# EAGLE board ProjV1 (EAGLE 9.6.2)
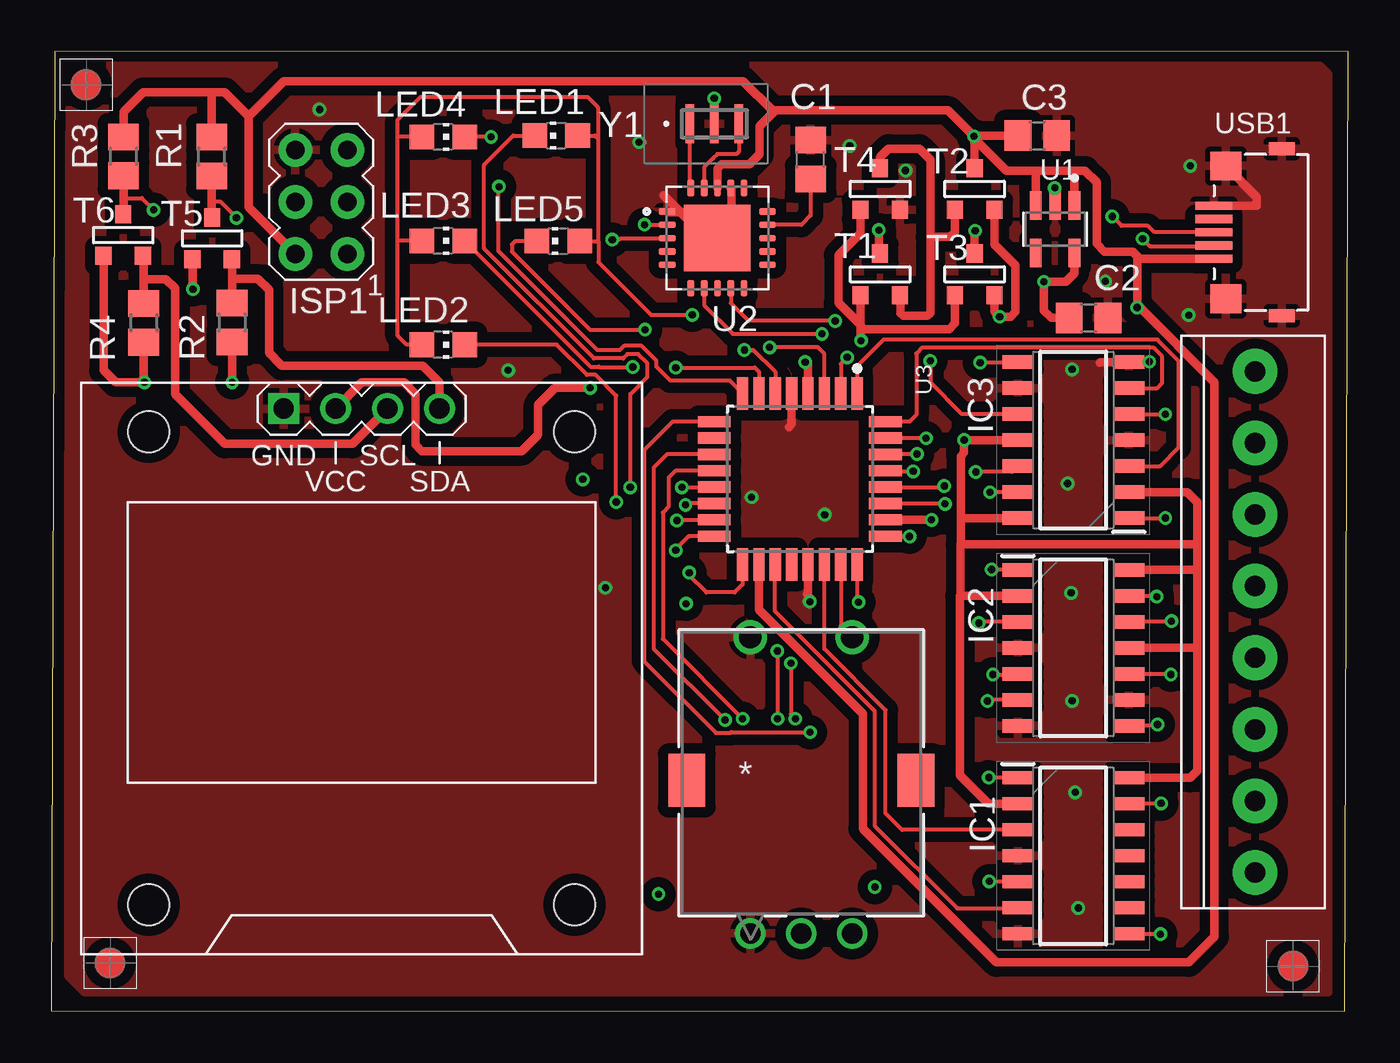
[diagram p0: board, top side]
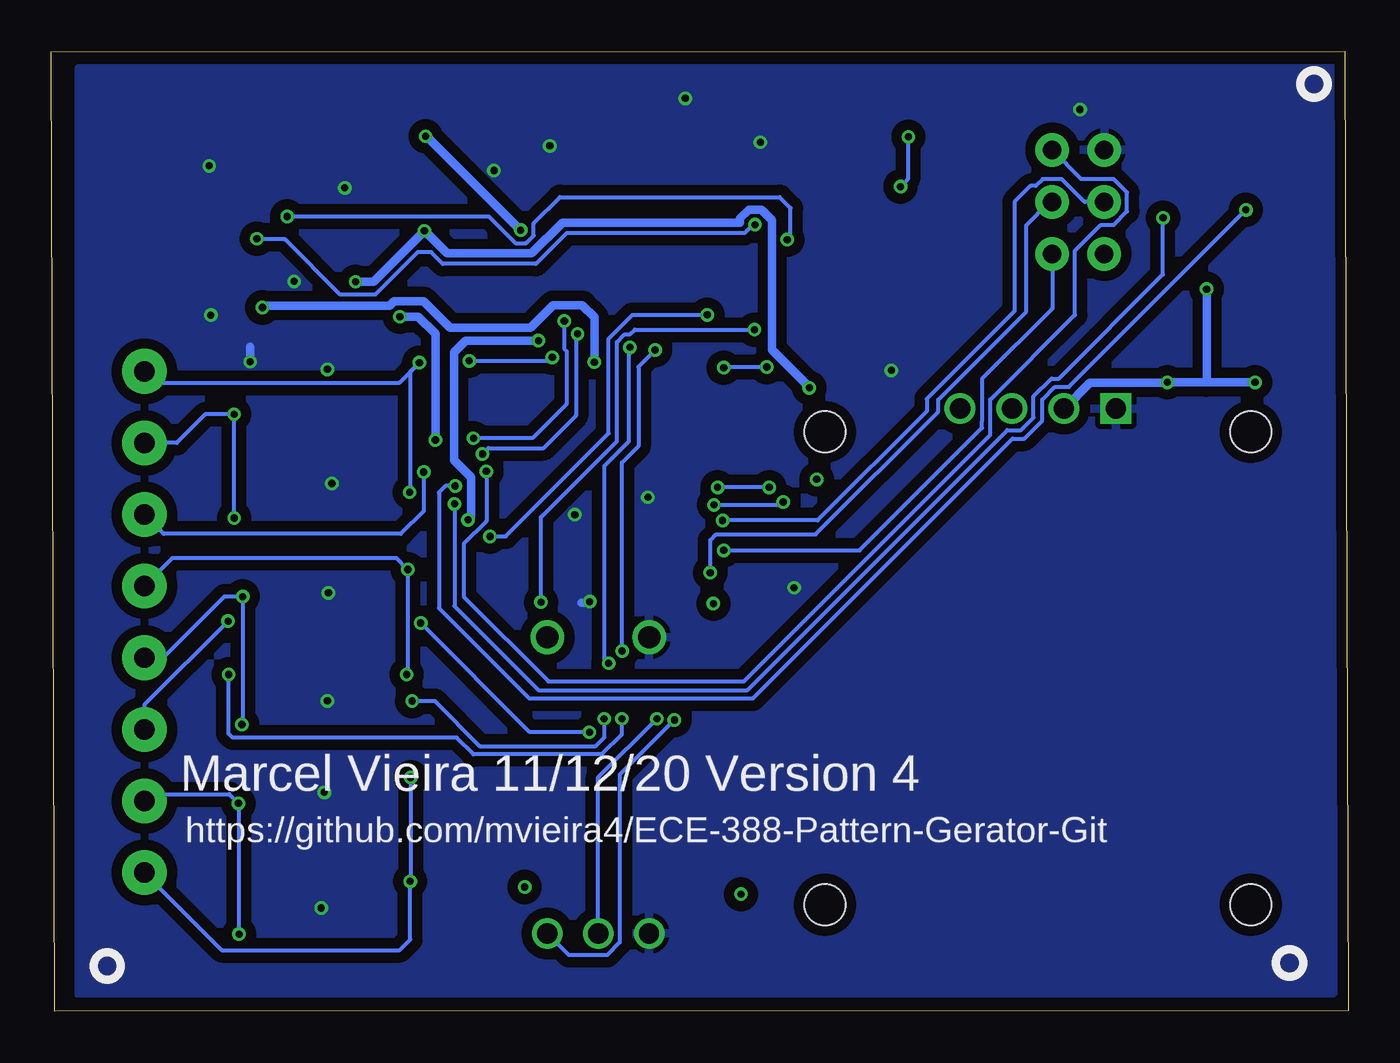
[diagram p1: board, bottom side, seen from below]

Size 63.43 x 46.94 mm. Coordinates in mm from the lower left corner, seen from the top.
Outline: 0,0.03 63.25,0 63.43,46.91 0.18,46.94 0,0.03
Copper layers (1*16): Top 0.035mm / dielectric 1.5mm / Bottom 0.035mm
Design rules "Dirty8TS": minimum track width 5mil, minimum drill 12mil, track to track 8mil, track to pad 8mil, pad to pad 8mil, via to via 8mil, smd to smd 0mil, copper to edge 10mil, drill to drill 10mil, minimum pad ring 10mil, minimum via ring 6mil, stop-mask expansion 2mil, vias tented up to drill 25mil, thermal gap 10mil

## Footprints (pad centres in the part's own frame; a part is rotated, then mirrored left to right if it is on the bottom)
C0805 = smd 1.3 x 1.5: 1 -0.95,0; 2 0.95,0
SOIC127P600X175-14N = smd 1.525 x 0.65: 1 -2.712,3.81; 2 -2.712,2.54; 3 -2.712,1.27; 4 -2.712,0; 5 -2.712,-1.27; 6 -2.712,-2.54; 7 -2.712,-3.81; 8 2.712,-3.81; 9 2.712,-2.54; 10 2.712,-1.27; 11 2.712,0; 12 2.712,1.27; 13 2.712,2.54; 14 2.712,3.81
AVRISP = drill 0.9 pad 1.626: 1 -1.27,2.54; 2 1.27,2.54; 3 -1.27,0; 4 1.27,0; 5 -1.27,-2.54; 6 1.27,-2.54
1X08-3.5MM = drill 1 pad 2.184: 1 -12.25,0; 2 -8.75,0; 3 -5.25,0; 4 -1.75,0; 5 1.75,0; 6 5.25,0; 7 8.75,0; 8 12.25,0
CHIP-LED0805 = smd 1.2 x 1.2: A 0,-1.05; C 0,1.05
R0805 = smd 1.3 x 1.5: 1 -0.95,0; 2 0.95,0
SOT-23 = smd 0.787 x 0.889: 1 0.025,-1.016; 2 -0.94,1.016; 3 0.991,1.016
SOT95P280X145-5N = smd 1.39 x 0.58: 1 -1.165,0.95; 2 -1.165,0; 3 -1.165,-0.95; 4 1.165,-0.95; 5 1.165,0.95
QFN65P500X500X100-21N = smd 0.81 x 0.32: 1 -2.45,1.3; 2 -2.45,0.65; 3 -2.45,0; 4 -2.45,-0.65; 5 -2.45,-1.3; 11 2.45,-1.3; 12 2.45,-0.65; 13 2.45,0; 14 2.45,0.65; 15 2.45,1.3 | smd 0.32 x 0.81: 6 -1.3,-2.45; 7 -0.65,-2.45; 8 0,-2.45; 9 0.65,-2.45; 10 1.3,-2.45; 16 1.3,2.45; 17 0.65,2.45; 18 0,2.45; 19 -0.65,2.45; 20 -1.3,2.45 | smd 3.25 x 3.25: 21 0,0
QFP80P900X900X120-32N = smd 1.6 x 0.55: 1 -4.18,2.8; 2 -4.18,2; 3 -4.18,1.2; 4 -4.18,0.4; 5 -4.18,-0.4; 6 -4.18,-1.2; 7 -4.18,-2; 8 -4.18,-2.8; 17 4.18,-2.8; 18 4.18,-2; 19 4.18,-1.2; 20 4.18,-0.4; 21 4.18,0.4; 22 4.18,1.2; 23 4.18,2; 24 4.18,2.8 | smd 0.55 x 1.6: 9 -2.8,-4.18; 10 -2,-4.18; 11 -1.2,-4.18; 12 -0.4,-4.18; 13 0.4,-4.18; 14 1.2,-4.18; 15 2,-4.18; 16 2.8,-4.18; 25 2.8,4.18; 26 2,4.18; 27 1.2,4.18; 28 0.4,4.18; 29 -0.4,4.18; 30 -1.2,4.18; 31 -2,4.18; 32 -2.8,4.18
EN11-HSM_TTE = drill 0.991 pad 1.499: 1 -2.489,7.874; 2 2.489,7.874; 3 0,7.874 | drill 1.092 pad 1.6: 4 -2.489,22.352; 5 2.489,22.352 | smd 1.803 x 2.591: 6 -5.601,15.354; 7 5.601,15.354
DISPLAY-OLED-128X64-I2C = drill 1 square: 1 -3.81,12.7 | drill 1: 2 -1.27,12.7; 3 1.27,12.7; 4 3.81,12.7 | hole 2: -10.414,11.557; 10.414,11.557; 10.414,-11.557; -10.414,-11.557
C77238 = smd 1.5 x 1.4: 0 0.825,0.814; 0A 0.825,7.314 | smd 1.27 x 0.635: 0B 3.566,8.139; 0C 3.566,-0.011 | smd 1.8 x 0.4: 1 0.244,2.768; 2 0.244,3.418; 3 0.244,4.068; 4 0.244,4.718; 5 0.244,5.369
CSTNE12M0G55A000R0 = smd 0.4 x 1.9: 1 1.2,0; 2 0,0; 3 -1.2,0

## Placement (x,y rotation side)
C1  1u  [C0805]  37.14,41.64 90 top
C2  1u  [C0805]  50.72,33.9 0 top
C3  1u  [C0805]  48.22,42.81 0 top
IC1  CD4007UBM  [SOIC127P600X175-14N]  49.98,7.61 0 top
IC2  CD4007UBM  [SOIC127P600X175-14N]  49.98,17.77 0 top
IC3  CD4007UBM  [SOIC127P600X175-14N]  49.98,27.93 180 top
ISP1  AVRISP-6  [AVRISP]  13.21,39.57 180 top
JP1  [1X08-3.5MM]  58.87,19.04 270 top
LED1  [CHIP-LED0805]  24.69,42.81 90 top
LED2  [CHIP-LED0805]  19.17,32.59 270 top
LED3  [CHIP-LED0805]  19.17,37.67 270 top
LED4  [CHIP-LED0805]  19.17,42.75 270 top
LED5  [CHIP-LED0805]  24.79,37.66 90 top
R1  10k  [R0805]  7.86,41.79 90 top
R2  10k  [R0805]  8.85,33.67 270 top
R3  10k  [R0805]  3.54,41.8 90 top
R4  10k  [R0805]  4.53,33.66 270 top
T1  [SOT-23]  40.56,36.03 180 top
T2  [SOT-23]  45.18,40.2 180 top
T3  [SOT-23]  45.18,36.03 180 top
T4  [SOT-23]  40.56,40.2 180 top
T5  [SOT-23]  7.9,37.79 180 top
T6  [SOT-23]  3.55,37.95 180 top
U1  MIC5504-3.3YM5-T5  [SOT95P280X145-5N]  49.09,38.24 270 top
U2  MCP2200-I/MQ  [QFN65P500X500X100-21N]  32.58,37.8 0 top
U3  ATMEGA328PB-AU  [QFP80P900X900X120-32N]  36.61,26.03 270 top
U4  EN11-HSM1BF20  [EN11-HSM_TTE]  36.68,-4.06 0 top
U$1  DISPLAY-OLED-128X64-I2C  [DISPLAY-OLED-128X64-I2C]  15.18,16.77 0 top
U$2  [FIDUCIAL_G15S]  2.88,2.37 0 top
U$3  [FIDUCIAL_G15S]  1.71,45.3 0 top
U$4  [FIDUCIAL_G15S]  60.72,2.22 0 top
USB1  C77238  [C77238]  56.61,34.02 0 top
Y1  CSTNE12M0G55A000R0  [CSTNE12M0G55A000R0]  32.43,43.39 180 top

## Library data of the parts
C1-C3 = rcl; SPICEPREFIX: C
IC1-IC3 = CD4007UBM; ARROW_PART_NUMBER: CD4007UBM; ARROW_PRICE-STOCK: https://www.arrow.com/en/products/cd4007ubm/texas-instruments; DESCRIPTION: Texas Instruments CD4007UBM Inverter, 3 18 V, 14-Pin SOIC; HEIGHT: 1.75mm; MANUFACTURER_NAME: Texas Instruments; MANUFACTURER_PART_NUMBER: CD4007UBM; MOUSER_PART_NUMBER: 595-CD4007UBM; MOUSER_PRICE-STOCK: https://www.mouser.co.uk/ProductDetail/Texas-Instruments/CD4007UBM?qs=LfG3tU9ud8BhOMkMTdqqtw%3D%3D
ISP1 JP1 = adafruit
LED1-LED5 = led
R1-R4 = rcl; SPICEPREFIX: R
T1-T6 = zetex; OC_FARNELL: unknown; OC_NEWARK: unknown
U1 = MIC5504-3.3YM5-T5; AVAILABILITY: Good; DESCRIPTION: Linear Voltage Regulator IC 1 Output 300mA SOT-23-5; MF: Microchip; MP: MIC5504-3.3YM5-T5; PACKAGE: SOT-23-5 Microchip; PRICE: None; PURCHASE-URL: https://pricing.snapeda.com/search/part/MIC5504-3.3YM5-T5/?ref=eda
U2 = MCP2200-I_MQ; AVAILABILITY: Good; DESCRIPTION: USB Bridge, USB to UART USB 2.0 UART Interface 20-VQFN (5x5); MF: Microchip; MP: MCP2200-I/MQ; PACKAGE: VQFN-20 Microchip; PRICE: None; PURCHASE-URL: https://pricing.snapeda.com/search/part/MCP2200-I/MQ/?ref=eda
U3 = ATMEGA328PB-AU; AVAILABILITY: Good; DESCRIPTION: 8-bit Microcontrollers - MCU ATMEGA328PB 20MHZ IND TEMP; MF: Microchip Technology / Atmel; MP: ATMEGA328PB-AU; PACKAGE: None; PRICE: None; PURCHASE-URL: https://pricing.snapeda.com/search/part/ATMEGA328PB-AU/?ref=eda
U4 = EN11-HSM1BF20; MANUFACTURER_PART_NUMBER: EN11-HSM1BF20; SOURCELIBRARY: TTELECTRONICS_2018-05-01A; VENDOR: TT Electronics
U$1 = diy-modules
U$2-U$4 = dicons
USB1 = usbFromLCSC
Y1 = CSTNE12M0G55A000R0; ARROW_PART_NUMBER: CSTNE12M0G55A000R0; ARROW_PRICE-STOCK: https://www.arrow.com/en/products/cstne12m0g55a000r0/murata-manufacturing; DESCRIPTION: Resonators 12.0000MHz 33pF SMD CHP Resntr AUTO GRD; HEIGHT: 0.8mm; MANUFACTURER_NAME: Murata Electronics; MANUFACTURER_PART_NUMBER: CSTNE12M0G55A000R0; MOUSER_PART_NUMBER: 81-CSTNE12M0G55A000R; MOUSER_PRICE-STOCK: https://www.mouser.com/Search/Refine.aspx?Keyword=81-CSTNE12M0G55A000R

## Nets
0: C1.2 C2.2 C3.2 IC1.4 IC1.7 IC2.4 IC2.7 IC2.9 IC3.4 IC3.7 IC3.9 ISP1.6 T4.2 U1.2 U2.1 U2.17 U2.21 U3.5 U3.21 U4.1 U4.4 U$1.1 USB1.0 USB1.0A USB1.0B USB1.0C USB1.5 Y1.2
+3V3: C2.1 R2.2 R4.2 T3.1 T5.3 T6.3 U1.5 U$1.2
+5V: C3.1 ISP1.2 R1.2 R3.2 T1.1 T2.1 U1.1 U1.3 U2.18 U3.4 U3.18 USB1.1
C1: IC3.8 IC3.13 JP1.1
C2: IC3.1 IC3.5 JP1.2
C3: IC3.12 JP1.3
C4: IC2.1 IC2.5 JP1.4
C5: IC2.8 IC2.13 JP1.5
C6: IC2.12 JP1.6
C7: IC1.8 IC1.13 JP1.7
C8: IC1.1 IC1.5 JP1.8
CLK: U3.12 U4.3
D+: U2.3 USB1.3
D-: U2.2 USB1.2
DT: U3.23 U4.5
LC: IC1.2 IC1.14 IC2.2 IC2.11 IC2.14 IC3.2 IC3.11 IC3.14 T2.2 T3.2
LC1: IC3.6 U3.32
LC2: IC3.3 U3.1
LC3: IC3.10 U3.2
LC4: IC2.3 U3.9
LC5: IC2.6 U3.3
LC6: IC2.10 U3.6
LC7: IC1.6 U3.19
LC8: IC1.3 U3.22
LED1: LED1.C U3.13
LED2: LED2.C U3.14
LED3: LED3.C U3.7
LED4: LED4.C U3.8
LED5: LED5.C U3.24
LEDA: LED1.A LED2.A LED3.A LED4.A LED5.A U3.25
MISO: ISP1.1 U3.16
MOSI: ISP1.4 U3.15
N$1: IC1.9
N$2: IC1.10
N$3: IC1.11
N$4: U3.10
N$5: IC1.12
N$6: U2.19 Y1.3
N$7: C1.1 U2.14
N$9: T1.2 T2.3 T4.1
N$10: U2.7 U3.30
N$11: U2.9 U3.31
N$14: U2.20 Y1.1
N$16: R2.1 T5.2 U$1.4
N$19: R4.1 T6.2 U$1.3
N$30: U3.20
RST: ISP1.5 U3.29
SCK: ISP1.3 U3.17
SCL: R3.1 T6.1 U3.28
SDA: R1.1 T5.1 U3.27
SW: U3.11 U4.2
VSET: T1.3 T3.3 T4.3 U3.26

## Tracks (layer width: path | path; a pad name or v marks a point on that pad's centre or on a via)
0  (via drill 0.35)
  Top 0.406: v53.7,31.76 53.68,31.74 IC3.7 51.3,31.74 51.27,31.71 | U3.21 37.01,20.45 36.95,20.38 37.1,20.23 v37.1,20.04 | U1.2 49.08,39.42 v49.08,40.26 | Y1.2 v32.43,44.63 | USB1.0A 58.96,39.81 58.96,39.39 USB1.5 | U2.1 30.16,39.08 31.23,39.08 32.51,37.8 U2.21 | U2.21 32.66,37.8 33.26,38.39 33.26,40.23 U2.17 | U3.5 36.21,28.7 36.08,28.56 | U2.21 32.04,37.8 29.95,39.88
  Bottom 0.406: v53.7,31.76 53.7,32.48 | 37.5,19.98 37.15,19.98 v37.1,20.04
  other vias: 13.12,44.09 22.35,31.34 51.55,35.69 39.05,42.31 55.7,41.34 41.77,41.11 49.93,31.38 49.7,25.81 49.88,20.46 49.93,15.18 50.23,5.06 50.08,10.71 27.1,20.71 34.25,25.13 37.83,24.29 55.62,34.03 28.75,42.48
  pour Top (isolate 0.508): 0.84,46.23 0.84,1.75 1.65,0.93 62.45,0.93 62.45,45.81 62.04,46.23
  pour Bottom (isolate 0.508): 0.74,46.11 0.74,0.9 61.98,0.9 62.07,0.81 62.07,46.11
+3V3  (via drill 0.35)
  Top 0.406: T5.3 6.91,35.33 v6.93,35.31 | R2.2 v8.85,30.75 | R4.2 4.53,30.78 | 4.53,30.78 v4.56,30.75 | T6.3 2.56,31.34 3.15,30.75 4.5,30.75 4.53,30.78 | U1.5 50.04,36.09 49.62,35.67 v48.54,35.67 48.54,34.26 48.9,33.9 C2.1 | T3.1 45.16,38.13 v45.18,38.16 | U$1.2 15.19,30.75 17.25,30.75 17.82,30.18 17.82,27.69 18.12,27.39 23.01,27.39 23.82,28.2 23.82,29.65 24.65,30.48 v26.36,30.48
  Bottom 0.406: U$1.2 13.89,29.47 12.63,30.73 8.87,30.73 v8.85,30.75 6.96,30.75 | v4.56,30.75 6.96,30.75 | v48.54,35.67 47.67,35.67 v45.18,38.16 44.07,37.05 39.93,37.05 38.43,38.55 29.75,38.55 29.75,38.76 29.32,39.19 28.71,39.19 28.19,38.67 28.19,32.34 26.36,30.51 v26.36,30.48 | v6.93,35.31 6.93,30.78 6.96,30.75
+5V  (via drill 0.35)
  Top 0.406: R3.2 3.54,43.98 4.5,44.94 7.89,44.94 | ISP1.2 9.66,39.31 9.66,43.77 | 9.66,43.77 8.49,44.94 7.89,44.94 | R1.2 7.86,44.91 7.89,44.94 | T1.1 40.47,37.11 v40.47,38.19 | v45.12,42.78 45.16,42.74 T2.1 | C3.1 45.15,42.81 | 45.15,42.81 v45.12,42.78 | 48.06,41.1 46.71,41.1 45.15,42.66 45.15,42.81 | U1.3 48.14,41.02 48.06,41.1 | 50.01,41.1 50.55,41.1 51.12,40.53 51.12,37.53 51.51,37.14 52.89,37.14 53.1,36.93 53.1,36.69 | 50.01,41.1 48.06,41.1 | 50.01,41.1 50.04,41.07 U1.1 | U2.18 32.58,41.19 32.79,41.4 34.14,41.4 34.63,41.89 34.63,43.26 35.41,44.04 | v45.12,42.78 43.86,44.04 35.41,44.04 | U3.4 37.01,31.6 v36.87,31.74 | 35.41,44.04 35.28,44.04 33.84,45.48 11.37,45.48 9.66,43.77 | U3.18 34.61,19.63 37.35,16.89 39.69,14.55 39.69,8.94 46.23,2.4 55.62,2.4 56.88,3.66 56.88,30.77 53.24,34.41 v53.1,34.41 53.1,36.69 | USB1.1 53.2,36.79 53.1,36.69
  Bottom 0.406: v40.47,38.19 45.06,42.78 v45.12,42.78 | v36.87,31.74 36.87,33.93 37.47,34.53 38.88,34.53 39.99,33.42 43.92,33.42 45.22,34.72 46.65,34.72 46.88,34.5 53.01,34.5 v53.1,34.41
C1  (via drill 0.35)
  Top 0.203: IC3.8 47.24,31.71 v45.43,31.71 | IC3.13 47.26,25.38 v45.9,25.38
  Bottom 0.203: v45.9,25.38 45.87,25.41 45.87,31.27 v45.43,31.71 46.4,30.74 58.32,30.74 JP1.1
C2  (via drill 0.35)
  Top 0.203: IC3.5 v54.47,29.2 v54.48,29.19 | IC3.1 v54.48,24.12
  Bottom 0.203: JP1.2 57.29,27.79 55.89,29.19 v54.48,29.19 v54.48,24.12
C3  (via drill 0.35)
  Top 0.203: IC3.12 46.98,26.37 v45.21,26.37
  Bottom 0.203: v45.21,26.37 45.21,24.46 46.33,23.34 57.92,23.34 JP1.3
C4  (via drill 0.35)
  Top 0.203: IC2.1 46.01,21.58 v45.99,21.6 | v46.05,16.47 47.24,16.47 IC2.5
  Bottom 0.203: v46.05,16.47 45.99,16.53 45.99,18.73 45.99,19.25 v45.99,21.6 46.56,22.17 57.49,22.17 JP1.4
C5  (via drill 0.35)
  Top 0.203: IC2.13 54.03,20.31 v54.06,20.28 | v54.1,14.02 54.04,13.96 IC2.8
  Bottom 0.203: v54.1,14.02 54.06,14.06 v54.06,20.28 54.96,20.28 57.95,17.29 JP1.5
C6  (via drill 0.35)
  Top 0.203: IC2.12 52.73,19.08 v54.78,19.08
  Bottom 0.203: v54.78,19.08 58.87,14.99 JP1.6
C7  (via drill 0.35)
  Top 0.203: IC1.13 54.25,10.15 v54.27,10.17 | v54.24,3.78 52.71,3.78 IC1.8
  Bottom 0.203: v54.24,3.78 54.27,3.81 v54.27,10.17 54.72,10.62 58.54,10.62 JP1.7
C8  (via drill 0.35)
  Top 0.203: IC1.1 45.86,11.42 v45.84,11.43 | v45.87,6.36 47.25,6.36 IC1.5
  Bottom 0.203: v45.84,11.43 45.84,6.39 v45.87,6.36 45.87,3.51 46.38,3 55.08,3 JP1.8
CLK  (via drill 0.35)
  Top 0.203: U3.12 30.54,26.43 30.2,26.09 30.2,24.67 29.91,24.38 29.91,18.21 v33.81,14.31
  Bottom 0.203: U4.3 36.68,11.44 v33.81,14.31
D+  (via drill 0.35)
  Top 0.203: U2.3 30.1,37.77 27.81,37.77 27.77,37.73 v27.44,37.73 | USB1.3 53.95,38.09 53.63,38.4 52.34,38.4 v51.88,38.86
  Bottom 0.203: v27.44,37.73 27.27,37.9 27.27,39.27 27.81,39.81 38.55,39.81 39.84,38.52 39.84,37.93 40.21,37.56 40.73,37.56 42.03,38.86 v51.88,38.86
D-  (via drill 0.35)
  Top 0.203: U2.2 29.02,38.45 v29.01,38.46 | v53.37,37.77 53.73,37.41 56.83,37.41 USB1.2
  Bottom 0.203: v53.37,37.77 53.34,37.74 51.99,37.74 49.29,35.04 47.58,35.04 45.51,37.11 44.85,37.11 44.28,36.54 39.72,36.54 38.22,38.04 29.54,38.04 29.12,38.46 v29.01,38.46
DT
  Top 0.203: U3.23 38.61,18.85 U4.5
LC  (via drill 0.35)
  Top 0.406: T2.2 46.12,37.5 47.16,36.46 47.16,34.2 46.92,33.96 v46.38,33.96 46.12,34.22 T3.2 | IC3.11 v44.64,27.93 44.64,27.3 44.48,27.14 44.48,24.11 | 44.43,20.31 44.43,11.55 45.83,10.15 IC1.2 | IC2.2 44.43,20.31 | 47.17,24.02 IC3.14 44.49,24.12 44.48,24.11 | IC3.2 55.55,25.39 56.04,24.9 56.04,22.83 | 56.04,22.83 56.04,21.6 | 56.04,21.6 56.04,17.79 | 56.04,17.79 56.04,11.76 55.7,11.42 IC1.14 | IC2.11 56.02,17.77 56.04,17.79 | IC2.14 56.02,21.58 56.04,21.6 | 44.48,22.83 44.46,22.83 44.46,20.34 44.43,20.31 | 44.48,22.83 56.04,22.83 | 44.48,22.83 44.48,24.11
  Bottom 0.406: v44.64,27.93 44.64,33.12 45.48,33.96 v46.38,33.96
LC1
  Top 0.203: IC3.6 54.08,30.47 54.33,30.72 54.33,32.02 53.92,32.43 42.58,32.43 42.3,32.15 42.3,29.16 41.97,28.83 U3.32
LC2
  Top 0.203: IC3.3 54.23,26.66 55.14,27.57 55.14,31.79 54.09,32.84 40.7,32.84 39.41,31.55 U3.1
LC3  (via drill 0.35)
  Top 0.203: IC3.10 44.54,29.2 42.99,30.75 v42.99,31.8 | v38.93,31.97 38.61,31.65 U3.2
  Bottom 0.203: v42.99,31.8 39.1,31.8 v38.93,31.97
LC4  (via drill 0.35)
  Top 0.203: IC2.3 45.41,19.04 v45.36,18.99 | U3.9 30.39,28.83 28.99,27.43 28.99,17.13 32.5,13.62 33.21,13.62 33.25,13.65 v37.11,13.65
  Bottom 0.203: v45.36,18.99 40.05,13.68 37.14,13.68 v37.11,13.65
LC5  (via drill 0.35)
  Top 0.203: IC2.6 45.83,15.23 v45.78,15.18 | U3.3 37.81,32.14 37.49,32.46 v35.13,32.46 | v36.39,14.31 36.17,14.53 v36.17,17.02
  Bottom 0.203: v45.78,15.18 44.68,15.18 42.47,12.97 36.8,12.97 36.39,13.39 v36.39,14.31 | v36.17,17.02 36.39,17.24 36.39,26.65 35.19,27.85 35.19,32.4 v35.13,32.46
LC6  (via drill 0.35)
  Top 0.203: IC2.10 54.72,16.5 v54.75,16.47 | v33.9,32.33 34.34,32.33 35.41,31.26 U3.6 | v35.51,17.62 v35.51,14.32 v35.52,14.31
  Bottom 0.203: v35.51,17.62 v35.52,17.63 35.52,26.82 34.72,27.62 34.72,31.5 v33.9,32.33 | v35.52,14.31 35.52,13.56 36.52,12.56 42.78,12.56 43.6,13.38 54.55,13.38 54.75,13.58 v54.75,16.47
LC7
  Top 0.203: IC1.6 47.24,5.04 44.31,5.04 40.26,9.09 40.26,14.7 35.37,19.59 35.37,21.81 U3.19
LC8
  Top 0.203: IC1.3 41.61,8.88 40.8,9.69 40.8,14.73 37.81,17.72 U3.22
LED1  (via drill 0.35)
  Top 0.203: LED1.C 22.59,42.81 21.18,41.4 21.18,37.29 26.54,31.93 27.97,31.93 28.18,32.13 28.7,32.13 29.16,31.67 29.16,31.02 28.32,30.18 v28.32,25.62 | v30.84,25.62 U3.13
  Bottom 0.203: v28.32,25.62 v30.84,25.62
LED2  (via drill 0.35)
  Top 0.203: U3.14 31.09,24.83 v31.02,24.76 | v27.63,24.9 27.63,30.1 26.62,31.11 26.2,31.11 24.73,32.59 LED2.C
  Bottom 0.203: v31.02,24.76 27.63,24.76 v27.63,24.9
LED3  (via drill 0.35)
  Top 0.203: LED3.C 26.37,31.52 26.79,31.52 26.81,31.5 v28.44,31.5 | v30.54,31.47 34.41,31.47 34.61,31.27 U3.7
  Bottom 0.203: v28.44,31.5 30.51,31.5 v30.54,31.47
LED4  (via drill 0.35)
  Top 0.203: U3.8 33.18,30.84 30.28,30.84 29.6,31.52 29.6,31.81 28.87,32.54 28.01,32.54 27.8,32.33 26.71,32.33 21.87,37.17 21.87,40.29 v21.9,40.32 | v21.51,42.75 LED4.C
  Bottom 0.203: v21.9,40.32 21.54,40.68 21.54,42.72 v21.51,42.75
LED5  (via drill 0.35)
  Top 0.203: U3.24 39.41,20.08 v39.48,20.01 | v29.04,33.33 26.34,33.33 22.53,37.14 22.53,37.5 22.69,37.66 LED5.C
  Bottom 0.203: v39.48,20.01 39.48,24.16 35.76,27.88 35.76,32.72 35.39,33.09 35.13,33.09 34.89,33.33 v29.04,33.33
LEDA  (via drill 0.35)
  Top 0.203: LED2.A 17.39,32.59 16.95,33.03 16.95,37.71 | 16.95,37.71 16.95,42.78 | 16.95,42.78 16.95,43.59 18.06,44.7 26.22,44.7 26.73,44.19 26.73,42.66 | 26.73,42.66 26.73,37.66 | LED1.A 26.58,42.81 26.73,42.66 | LED5.A 26.73,37.66 | 26.73,37.66 26.76,37.66 26.76,36.63 29.34,34.05 v31.35,34.05 | LED3.A 16.99,37.67 16.95,37.71 | LED4.A 16.98,42.75 16.95,42.78 | U3.25 v41.96,23.23 v41.97,23.22
  Bottom 0.203: v41.97,23.22 41.2,23.22 36.17,28.26 36.17,32.89 35.01,34.05 v31.35,34.05
MISO  (via drill 0.35)
  Top 0.203: U3.16 31.17,23.22 30.52,22.56 v30.54,22.54
  Bottom 0.203: ISP1.1 14.48,34.36 17.92,30.93 17.92,28.86 17.91,28.86 17.91,28.53 23.9,22.54 v30.54,22.54
MOSI  (via drill 0.35)
  Top 0.203: U3.15 32.4,24 v30.6,24
  Bottom 0.203: ISP1.4 12.9,39.57 14.02,40.69 14.94,40.69 15.28,40.35 15.54,40.35 16.32,39.57 16.32,34.23 20.61,29.94 20.61,29.34 25.95,24 v30.6,24
N$6
  Top 0.203: Y1.3 33.62,42.02 33.51,41.91 32.58,41.91 32.37,41.7 31.93,41.26 U2.19
N$7
  Top 0.203: C1.1 37.14,38.91 36.68,38.45 U2.14
N$8  (via drill 0.35)
  other vias: 26,26.01
N$9
  Top 0.406: T4.1 40.54,41.77 40.95,42.18 42.45,42.18 42.99,41.64 42.99,37.86 | T1.2 41.53,34.98 41.53,34.13 41.66,34 42.85,34 42.99,34.14 42.99,37.86 | T2.3 44.19,38.1 43.95,37.86 42.99,37.86
N$10  (via drill 0.35)
  Top 0.203: U2.7 31.93,34.52 33.33,33.12 v37.69,33.12 | v42.34,27.25 40.81,27.25 U3.30
  Bottom 0.203: v42.34,27.25 42.05,27.54 39.35,27.54 37.77,29.12 37.77,33.05 v37.69,33.12
N$11  (via drill 0.35)
  Top 0.203: U2.9 33.23,34.63 34.11,33.75 v38.34,33.75 | v42.78,28.02 U3.31
  Bottom 0.203: v38.34,33.75 38.34,32.4 38.23,32.29 38.23,29.69 39.9,28.02 v42.78,28.02
N$14
  Top 0.203: Y1.1 31.23,40.3 U2.20
N$15  (via drill 0.35)
  other vias: 31.05,19.93
N$16
  Top 0.406: T5.2 8.85,35.82 | 8.85,35.82 R2.1 | U$1.4 18.99,30.73 18.16,31.56 11.28,31.56 10.65,32.19 10.65,35.28 10.11,35.82 8.85,35.82
N$19
  Top 0.406: T6.2 4.53,36.89 4.53,35.79 | 4.53,35.79 R4.1 | 4.53,35.79 5.61,35.79 6.06,35.34 6.06,30.18 8.49,27.75 14.73,27.75 U$1.3
N$23  (via drill 0.35)
  other vias: 40.27,6.08
N$24  (via drill 0.35)
  other vias: 29.7,5.74
RST  (via drill 0.35)
  Top 0.203: U3.29 40.82,26.4 v42.15,26.4
  Bottom 0.203: v42.15,26.4 42.15,23.97 43.26,22.86 43.26,20.28 39.12,16.14 29.55,16.14 17.5,28.19 17.5,29.03 17.51,29.03 17.51,29.91 13.36,34.05 13.36,37.19 12.1,38.45 11.48,38.45 10.82,39.11 10.82,40.03 11.48,40.69 13.06,40.69 ISP1.5
SCK  (via drill 0.35)
  Top 0.203: v31.2,21.45 31.2,21.33 32.04,20.49 33.42,20.49 33.81,20.88 U3.17
  Bottom 0.203: v31.2,21.45 31.2,23.04 30.91,23.32 26.05,23.32 20.05,29.33 20.05,29.91 15.75,34.21 15.75,38.43 14.61,39.57 ISP1.3
SCL  (via drill 0.35)
  Top 0.203: 3.54,39.75 4.44,39.75 v5.01,39.18 | U3.28 43.61,25.63 v43.67,25.69
  Top 0.406: R3.1 3.54,39.75 3.54,38.98 T6.1
  Bottom 0.203: v5.01,39.18 13.66,30.53 14.35,30.53 14.97,29.91 14.97,28.88 15.84,28 16.42,28 29.12,15.3 40.05,15.3 44.47,19.72 44.47,25.37 44.15,25.69 v43.67,25.69
SDA  (via drill 0.35)
  Top 0.203: v43.71,24.81 40.81,24.81 U3.27 | v9.06,38.79 8.28,39.57 7.86,39.57
  Top 0.406: R1.1 7.86,39.57 T5.1
  Bottom 0.203: v43.71,24.81 43.71,19.82 39.6,15.71 29.38,15.71 16.68,28.41 16.01,28.41 15.39,29.03 15.39,30.06 14.52,30.93 14.15,30.93 9.06,36.03 v9.06,38.79
SW  (via drill 0.35)
  Top 0.203: U3.11 30.11,27.23 29.46,26.58 29.46,17.74 v32.95,14.25
  Bottom 0.203: v32.95,14.25 35.63,11.58 35.63,3.38 36.24,2.76 38.12,2.76 U4.2
VSET  (via drill 0.35)
  Top 0.406: T3.3 44.19,33.63 43.92,33.36 39.75,33.36 39.57,33.54 | 39.57,33.57 39.57,33.54 | 39.57,33.57 T1.3 | T4.3 39.57,38.04 38.49,36.96 38.49,34.65 39.57,33.57 | 39.57,33.54 39.57,32.82 v39.6,32.79 | v43.05,24.03 U3.26
  Bottom 0.406: v39.6,32.79 43.16,32.79 43.72,32.22 43.72,26.94 42.9,26.11 42.9,24.18 v43.05,24.03

## Text on the board
bPlace: Marcel Vieira 11/12/20 Version 4 | https://github.com/mvieira4/ECE-388-Pattern-Gerator-Git